# Altium PCB GT1022_V3.PcbDoc (part 2 of 2)
Units mm, origin at the board's own origin, x right, y up, seen from the top; angles counter-clockwise.
Board outline 37.01 x 59.52 mm, 4 copper layers (L1, L2, L3, L4), stack 0.734 mm thick; 114 components, 83 nets, 524 pads, 318 vias.
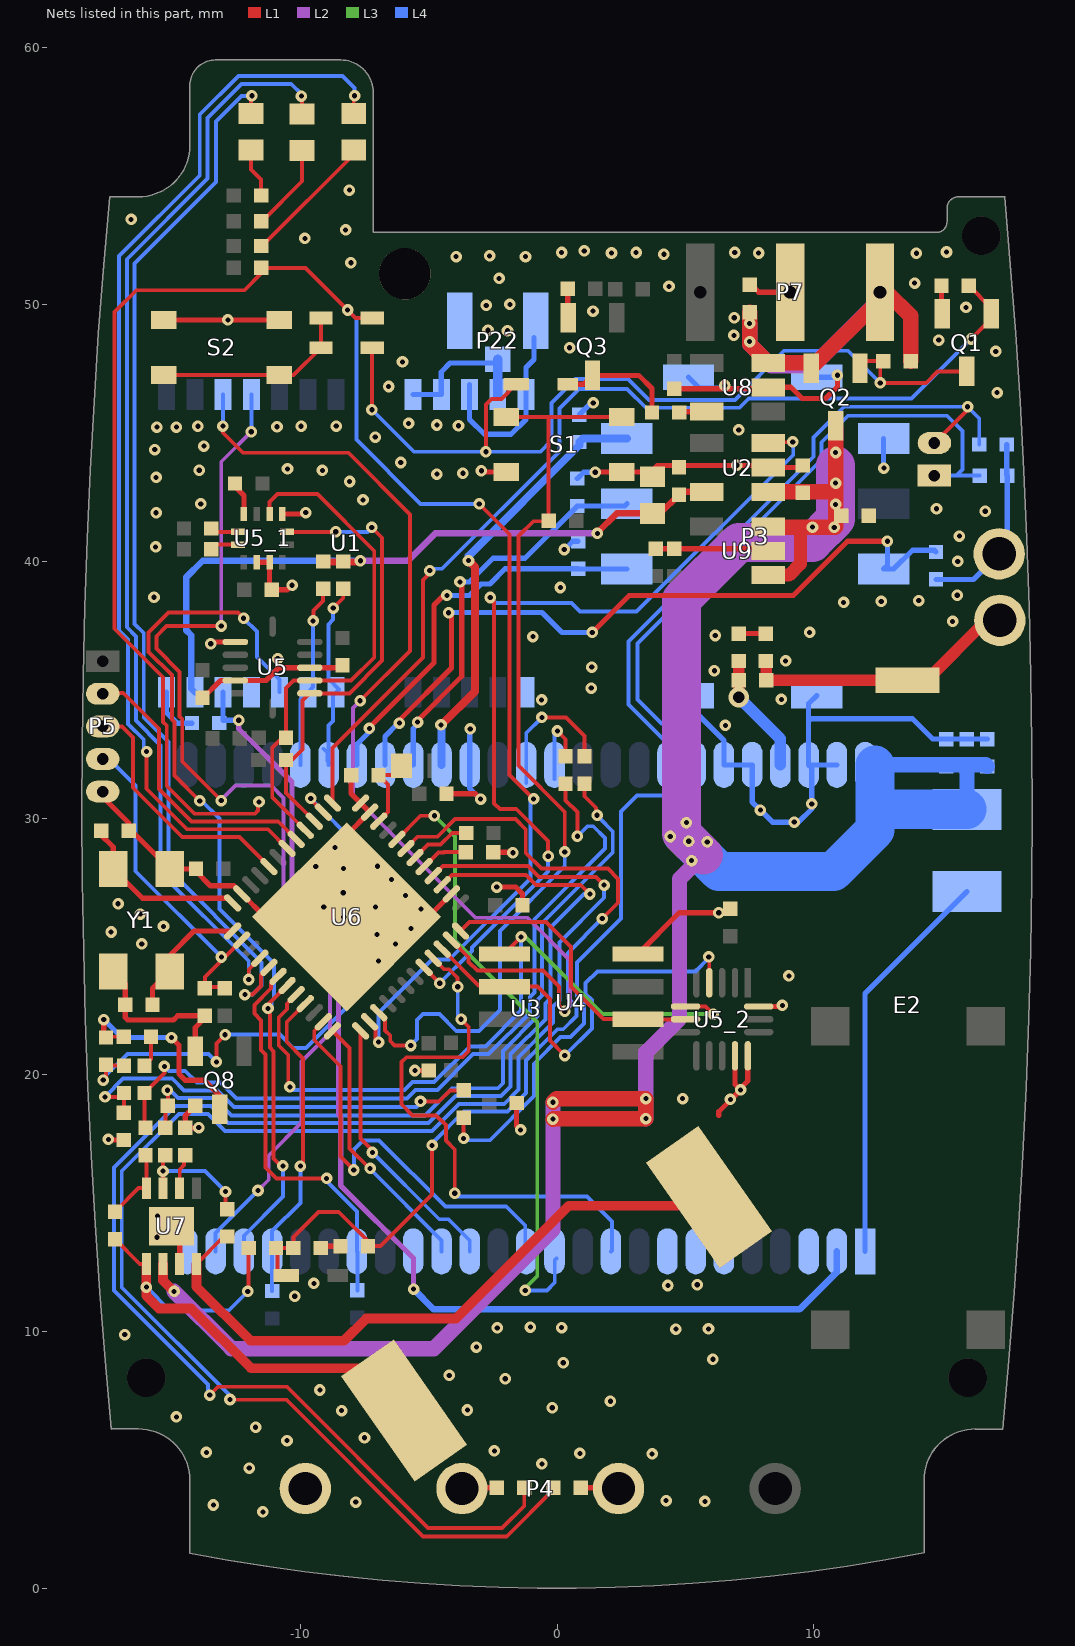
[diagram p4: the nets of this part, all layers, seen from the top]

## Via types
v1: diameter 0.45, hole 0.2, L1 to L4, 317 vias
v2: diameter 0.8, hole 0.45, L1 to L4, 1 vias

## Nets (pads, with @x,y where several pads share a name; then routed paths per layer and width w, separated by ;. In a path a pad name is that pad's centre, name@x,y a point inside that pad or via, vN(x,y) a via of type N, cw(c..) or ccw(c..) an arc to the next point about the centre after c; other vN are vias at no path point) (continued)
GND: C3.1 C5.1 C6.1 C7.1 C8.2 C9.2 C10.1 C11.2 C12.1 C13.1 C14.1 C15.1 C16.2 C17.1 C18.1 C19.1 C20.2 C21.1 C22.1 C23.2 C24.2 C25.2 C26.1 C27.1 C28.1 C29.1 C31.2 C34.2 C35.1 C37.1 C38.1 C39.1 C40.1 C41.2 C42.1 C43.2 C73.1 C74.1 C75.1 J5.1 P3.5 P3.8 P3.9 P3.10 P3.11 P4.4 P5.5 P7.2 P22.2 P22.3 pad.1@-5.93,51.2 Q1.2 Q3.2 Q8.2 R15.2 R24.2 R32.1 R70.1 S1.1 S1.2 S2.1 S2.2 U1.10 U1.12 U1.13 U1.24 U2.2 U3.1 U3.3 U3.6 U3.7 U3.8 U3.17 U3.25 U3.36 U3.45 U3.46 U3.48 U3.49 U4.4 U5.1 U5.4 U5.8 U5_1.1 U5_1.4 U5_1.8 U5_1.9 U5_2.12 U5_2.13 U5_2.16 U6.2 U6.11 U6.12 U6.23 U6.49 U7.7 U7.9 U8.2 U9.2 Y1.2 Y1.4 | length 153.7
  L1 w0.203: P5.5@-17.7,31.03 -17.7,30.82 -16.683,29.803 C29.1@-16.683,29.5 ; v1(-17.48,17.48) -17.457,17.457 R70.1@-16.88,17.457 ; Y1.4@-17.29,24.02 -16.823,23.553 C34.2@-16.823,22.73 -16.823,22.233 -16.72,22.13 -14.94,22.13 -14.773,22.297 C28.1@-13.721,22.297 -13.721,22.213 -14.094,21.84 Q8.2@-14.094,20.91 ; C29.1@-16.84,29.44 -16.51,29.44 Y1.2@-15.09,28.02 C24.2@-14.063,28.02 -14.063,27.927 -13.495,27.358 -12.595,27.358 U6.23@-12.285,27.048 -11.383,26.146 U6.49@-8.201,26.146 -8.201,29.328 U6.11@-7.3,30.23 U6.12@-7.653,30.584 -8.023,30.954 C27.1@-8.023,31.67 ; S2.1@-15.321,49.405 v1(-12.82,49.405) S2.2@-10.821,49.405 ; U7.9@-15.024,14.107 -14.699,13.782 U7.7@-14.699,12.632 ; C31.2@-14.094,18.786 -14.487,18.393 C37.1@-14.487,17.93 -13.97,17.93 v1(-13.96,17.94) ; C22.1@-13.81,34.687 -13.783,34.687 -13.112,35.358 U5.4@-12.533,35.358 -11.332,35.358 -10.832,35.858 ; v1@-13.566,36.694 -13.402,36.858 U5.1@-12.533,36.858 ; C74.1@-12.543,43.03 -12.543,42.903 -12.2,42.56 U5_1.4@-12.2,41.84 ; U5_1.8@-11.7,39.965 U5_1.9@-11.2,39.965 -11.2,38.973 C73.1@-11.117,38.89 -10.5,38.89 v1(-10.32,39.07) ; v1(-10.88,36.21) -10.88,35.907 -10.832,35.858 ; U5_1.1@-10.7,41.84 -9.85,41.84 v1(-9.79,41.9) ; R24.2@-9.207,13.252 -9.137,13.322 C35.1@-8.434,13.322 ; C21.1@-8.36,35.858 U5.8@-9.633,35.858 -10.832,35.858 ; U6.49@-7.83,26.17 -7.71,26.29 -4.876,26.29 U6.2@-4.118,27.048 ; v1(-5.54,20.167) C38.1@-5,20.167 ; C23.2@-4.307,30.95 -3.19,30.95 v1(-2.98,30.74) ; v1(-2.95,43.53) -2.95,43.57 -2.857,43.477 S1.2@-1.975,43.477 S1.2@-2.267,43.477 ; C25.2@-2.487,28.67 -1.74,28.67 v1(-1.72,28.65) ; v1(-2.35,27.31) -1.61,27.31 -1.347,27.047 C26.1@-1.347,26.6 ; C20.2@-1.577,18.9 -1.577,18.007 v1(-1.42,17.85) ; R32.1@0.417,50.62 0.417,49.508 Q3.2@0.43,49.495 ; v1(1.49,43.47) 1.497,43.477 S1.1@2.525,43.477 3.643,43.477 3.9,43.733 8.107,43.733 8.23,43.61 8.273,43.653 C7.1@9.34,43.653 ; U4.4@3.15,24.705 4.755,26.31 v1(6.3,26.31) ; C40.1@3.84,40.493 C41.2@4.57,40.493 8.137,40.493 U9.2@8.22,40.41 8.45,40.41 U9.2@8.54,40.5 ; C42.1@4.57,46.727 8.177,46.727 U8.2@8.23,46.78 9.11,46.78 9.55,46.34 10.46,46.34 10.92,46.8 v1(10.92,47.25) ; 6.3,18.41 6.3,18.56 v1(7.149,19.409) v1@7.114,19.444 ; U5_2.12@6.93,20.735 6.93,19.628 v1@7.114,19.444 ; C12.1@7.08,37.183 C13.1@8.13,37.183 ; U5_2.13@7.43,20.735 7.43,19.76 v1@7.114,19.444 ; C39.1@7.46,50.88 7.86,50.48 P7.2@9.079,50.48 ; U5_2.16@7.855,22.66 8.74,22.66 v1(8.78,22.7) ; R15.2@14.977,50.74 14.977,49.678 Q1.2@15.01,49.645
  L4 w0.203: U1.24@-15.21,34.9 -15.21,34.11 -14.79,33.69 C3.1@-14.223,33.69 ; U1.10@-3.41,46.89 U1.10@-3.41,46.5 -3.41,45.53 -2.83,44.95 -1.79,44.95 -1.21,45.53 U1.12@-1.21,46.5 -1.21,47.55 -0.9,47.86 P22.2@-0.9,48.72 ; v1(-3.38,33.47) -3.4,33.45 U3.36@-3.4,32.07 -3.4,31.16 v1(-2.98,30.74) ; v1(0.28,40.46) 0.29,40.46 0.613,40.783 C19.1@0.82,40.783 ; C18.1@0.79,43.223 1.037,43.47 v1(1.49,43.47) ; C16.2@0.87,45.713 1.327,46.17 v1(1.41,46.17) ; P3.9@5.12,34.77 5.12,34.4 6.5,33.02 U3.45@6.5,32.07 U3.46@7.6,32.07 7.6,30.63 v1(7.92,30.31) 8.39,29.84 v1(9.24,29.84) 9.41,29.84 9.92,30.35 v1(9.92,30.55) 9.92,31.95 U3.48@9.8,32.07 ; P3.10@5.12,47.17 5.55,46.74 v1@6.54,46.74 ; P3.8@10.12,34.77 9.8,34.45 9.8,33.78 ; P3.11@10.12,47.17 10.84,47.17 v1(10.92,47.25) ; U3.49@10.9,32.07 U3.48@9.8,32.07 ; U3.1@12,13.12 12,23.17 C11.2@15.97,27.14 ; P3.5@12.72,44.78 12.72,43.64 v1(12.73,43.63) ; C17.1@14.76,39.297 16.227,39.297 J5.1@17.22,40.29 17.533,40.603 C14.1@17.533,43.34 17.513,43.36 C15.1@17.513,44.55 ; C10.1@16.76,33.073 C8.2@15.96,33.073 C9.2@15.16,33.073 14.637,33.073 13.84,33.87 9.89,33.87 9.8,33.78 ; U3.48@9.8,32.07 9.8,33.78
  other v1: -11.46,2.97 -13.39,3.24 -7.84,3.35 5.76,3.38 4.25,3.41 -11.99,4.68 -0.59,4.84 3.7,5.23 0.89,5.25 -13.66,5.29 -2.44,5.35 -10.52,5.75 -7.5,5.86 -11.74,6.27 -14.83,6.67 -8.39,6.92 -3.49,6.94 -0.19,7.03 2.08,7.28 -9.24,7.72 -2.02,8.16 -4.2,8.29 0.24,8.78 6.07,8.92 -3.14,9.39 -16.84,9.88 4.63,10.09 5.9,10.1 -2.33,10.14 0.18,10.15 -1.04,10.17 -10.22,11.37 4.32,11.79 5.46,11.82 -9.47,11.87 -15.59,13.67 -15.56,14.495 6.75,19.04 4.89,19.07 9.03,23.85 -6.96,24.43 -6.3,25.09 -16.18,25.1 -7.02,25.46 -17.37,25.56 -5.69,25.69 -15.33,25.78 -8.31,26.146 -16.23,26.26 -5.3,26.46 -9.09,26.54 -7.07,26.53 -17.1,26.66 -5.9,26.98 -8.33,27.09 -6.45,27.6 -8.32,28.03 -9.4,28.11 -7,28.12 -8.65,28.85 6.56,33.61 -0.6,34.6 8.74,34.62 1.33,35.06 6.13,35.74 1.35,35.88 8.9,36.12 -13.49,36.79 -0.94,37.07 6.16,37.11 9.84,37.23 15.41,37.66 11.16,38.4 12.63,38.44 14.09,38.47 -15.7,38.6 15.59,38.68 0.13,38.98 15.61,40 -15.64,40.56 15.67,40.98 -15.62,41.89 16.68,41.95 14.78,42.05 -13.88,42.24 -7.56,42.39 -8.08,43.11 -15.62,43.27 -4.68,43.4 -3.67,43.43 -13.94,43.55 -9.14,43.54 -10.5,43.6 7,43.74 -6.09,43.85 -15.67,44.35 -13.76,44.49 -7.08,44.84 7.08,45.12 -15.59,45.23 -14.83,45.23 -13.99,45.26 -10.91,45.24 -9.97,45.26 -8.6,45.27 -3.84,45.28 -4.68,45.31 -5.78,45.37 17.14,46.57 -6.56,46.81 6.54,46.85 -6.02,47.77 17.09,48.18 0.49,48.32 14.87,48.62 -1.93,48.98 -2.69,49 1.4,49.75 15.93,49.89 -2.76,49.97 -1.84,50.01 4.36,50.71 13.93,50.84 -2.26,51.02 -8.03,51.63 -3.93,51.87 -1.23,51.87 -2.63,51.9 4.16,51.96 2.12,52.01 7.85,52.01 14,52 0.18,52.03 3.08,52.03 6.92,52.03 15.17,52.05 1.06,52.09 -9.82,52.58 -8.24,52.91 -16.59,53.32 -8.09,54.46
GPS_EN: U2.3 U6.44 | length 35
  L1 w0.152: U6.44@-5.178,24.184 v1@-4.65,23.656 ; v1(-2.6,38.59) -2.45,38.44 -2.45,30.57 -2.23,30.35 -1.59,30.35 -0.345,29.105 v1(-0.345,28.51) ; U2.3@8.23,44.603 8.267,44.64 v1@9.21,44.64
  L4 w0.152: v1@-4.65,23.486 -3.307,24.828 -3.307,24.956 -0.345,27.918 v1(-0.345,28.51) ; v1(-2.6,38.59) -2.38,38.37 0.57,38.37 0.9,38.04 3.1,38.04 9.2,44.14 9.2,44.63 v1(9.18,44.65) 9.2,44.65 v1@9.21,44.64
  other v1: -4.572,23.563
GPS_EXTINT0: U1.4 U3.24 | length 42.8
  L1 w0.152: v1(-13.08,30.68) -14.6,32.2 -14.6,33.859 -14.702,33.961 -14.702,35.692 -15.61,36.6 -15.61,37.08 -15.21,37.48 v1(-13.08,37.48)
  L2 w0.152: v1@-13.095,30.695 -12.52,31.27 -11.133,31.27 -10.65,30.787 -10.65,26.49 -8.84,24.68 -8.84,21.63 -9.948,20.522 -9.948,18.132 -11.23,16.85 -11.23,15.91 v1(-11.649,15.491) ; v1(-13.08,37.48) -13.08,43.88 v1(-11.91,45.05)
  L4 w0.152: U3.24@-13.3,13.12 -13.3,13.84 v1(-11.649,15.491) ; v1(-11.91,45.05) U1.4@-11.91,46.5
GPS_PULSE: U1.3 U6.47 | length 41.8
  L1 w0.152: v1(-13.02,45.27) -13.02,45.01 -12.24,44.23 -8.13,44.23 -5.73,41.83 -5.73,36.51 v1(-7.67,34.57) ; U6.47@-4.118,25.245 -3.45,24.577 -3.45,24.4 -3.103,24.053 -0.548,24.053 0.07,23.435 ; 0.07,22.87 0.07,23.435 ; v1(0.3,22.47) 0.07,22.7 0.07,23.435
  L2 w0.152: v1(-7.67,34.57) -7.946,34.294 -7.946,30.886 -3.175,26.115 -1.156,26.115 0.5,24.458 0.5,22.67 v1(0.3,22.47)
  L4 w0.152: v1(-13.02,45.27) -13.01,45.28 U1.3@-13.01,46.5
GPS_SCL: R1.1 U1.19 U3.30 | length 7.1
  L1 w0.152: v1@-9.49,37.78 -9.49,38.08 -9.11,38.46 R1.1@-9.11,38.927
  L4 w0.152: U3.30@-10,32.07 -10,34.61 U1.19@-9.71,34.9 -9.5,35.11 v1(-9.5,37.68)
GPS_SDA: R2.1 U1.18 U3.31 | length 8.8
  L1 w0.152: v1(-8.72,38.18) -8.33,38.57 R2.1@-8.33,38.927
  L4 w0.152: U3.31@-9.1,32.7 -8.95,32.55 -8.95,32.22 U3.31@-8.9,32.17 ; U3.31@-8.9,32.07 U3.31@-8.9,32.17 ; U3.31@-8.9,32.9 U3.31@-8.9,32.17 ; U3.31@-8.86,32.13 U3.31@-8.9,32.17 ; v1(-8.72,38.18) -8.72,37.73 -8.91,37.54 -8.91,35.429 -8.496,35.014 U1.18@-8.61,34.9 -8.72,34.79 -8.72,33.78 -8.9,33.6 U3.31@-8.9,32.17
GPS_TXD: U1.20 U3.23 U6.31 | length 35.7
  L1 w0.152: v1(-13.92,30.67) -14.902,31.652 -14.902,33.734 -15.005,33.836 -15.005,35.567 -15.912,36.475 -15.912,37.228 -15.14,38 -12.43,38 v1(-12.21,37.78) ; v1@-11.339,22.504 -11.19,22.355 -11.19,21.054 -11.048,20.912 -11.048,16.739 v1@-10.758,16.45 ; v1@-11.26,22.734 U6.31@-10.517,23.477
  L4 w0.152: v1(-13.92,30.67) -13.84,30.67 -13.15,29.98 -13.15,26.45 -11.03,24.33 -11.03,22.964 -11.13,22.864 -11.13,22.713 v1(-11.26,22.583) ; v1(-12.21,37.78) -11.69,37.26 -11.69,36.27 -10.81,35.39 U1.20@-10.81,34.9 ; U3.23@-12.2,13.12 -12.2,13.73 -10.68,15.25 v1(-10.68,16.45)
GSM_DTR: U3.12 U6.8 | length 24.4
  L1 w0.152: U6.8@-6.239,29.169 -5.318,30.09 v1(-4.78,30.09)
  L3 w0.152: v1(-4.78,30.09) -3.973,29.283 -3.973,25.233 -0.77,22.03 -0.77,12.17 -1.24,11.7 v1(-1.24,11.6)
  L4 w0.152: v1(-1.24,11.6) -0.39,11.6 -0.09,11.9 -0.09,12.78 -0.03,12.84 U3.12@-0.02,12.84
GSM_POWER: R3.2 U3.19 U6.30 | length 15.4
  L1 w0.152: U6.30@-10.871,23.831 -11.14,23.561 -11.14,23.37 -11.79,22.72 -11.79,22.38 -11.53,22.12 -11.53,20.966 -11.35,20.786 -11.35,16.38 -10.93,15.96 v1(-8.98,15.96)
  L4 w0.152: v1(-8.98,15.96) -8.98,15.86 -7.8,14.68 U3.19@-7.8,13.12 -7.78,13.1 R3.2@-7.78,11.603
GSM_RI: U3.10 U6.45 | length 21.4
  L1 w0.152: U6.45@-4.825,24.538 -4.397,24.11 -4.21,24.11 -3.88,23.78 -3.88,23.43 v1(-3.87,23.43) ; v1(-3.985,15.385) -3.985,17.095 -4.33,17.44 -4.33,18.04 -4.71,18.42 -5.63,18.42 -6.06,18.85 -6.06,20.49 -5.868,20.682 -3.689,20.682 -3.44,20.932 -3.44,21.86 v1(-3.74,22.16)
  L4 w0.152: v1(-3.985,15.385) -3.86,15.26 1.17,15.26 2.14,14.29 2.14,13.16 U3.10@2.1,13.12 ; v1(-3.87,23.43) -3.87,22.29 v1(-3.74,22.16)
GSM_RST: R4.2 U3.22 U6.33 | length 12.2
  L1 w0.152: v1@-9.9,16.44 -9.9,20.64 -10.53,21.27 -10.53,22.05 U6.33@-9.81,22.77
  L4 w0.152: R4.2@-11.1,11.573 U3.22@-11.1,13.12 -11.1,13.91 -10,15.01 v1(-10,16.44)
GSM_RTS: U3.13 U6.35 | length 16.6
  L1 w0.152: U6.35@-9.103,22.063 -9.46,21.706 -9.46,21.36 -8.43,20.33 -8.43,16.81 v1@-7.91,16.29
  L4 w0.152: v1@-7.91,16.29 -7.91,17.09 -7.56,17.44 -6.93,17.44 -4.35,14.86 -1.98,14.86 -1.24,14.12 -1.24,13.16 U3.13@-1.2,13.12
  other v1: -7.92,16.29
LED_BLUE: D1.2 U6.18 | length 42.4
  L1 w0.152: v1(-15.99,32.59) -15.99,31.14 -14.414,29.564 -11.265,29.564 U6.18@-10.517,28.816 ; D1.2@-7.921,57.444 -7.921,58.102 v1(-7.889,58.134)
  L4 w0.152: v1(-15.99,32.59) -16.1,32.7 -16.1,33.06 -16.71,33.67 -16.71,36.951 -17.064,37.304 -17.064,51.892 -13.919,55.036 -13.919,57.398 -12.415,58.903 -8.357,58.903 -8.111,58.656 ; -8.032,58.577 -8.111,58.656 ; v1(-7.889,58.134) -7.889,58.434 -8.111,58.656
LED_GREEN: D3.2 U6.29 | length 42
  L1 w0.152: v1(-12.16,23.12) -11.87,23.12 -11.53,23.46 -11.53,23.878 U6.29@-11.224,24.184 ; D3.2@-11.921,57.444 -11.921,58.1 v1(-11.887,58.134)
  L4 w0.152: v1(-12.16,23.12) -11.87,23.12 -11.51,23.48 -11.51,24.38 -15.138,28.008 -15.138,32.96 -16.1,33.923 -16.1,37.203 -16.454,37.557 -16.454,51.607 -13.287,54.774 -13.287,57.136 -12.289,58.134 -11.993,58.134 v1@-11.857,58.27
LED_RED: D2.2 U6.28 | length 43
  L1 w0.152: v1(-12.01,23.71) -12.01,24.106 U6.28@-11.578,24.538 ; v1(-9.959,58.12) -9.936,58.097 D2.2@-9.936,57.43
  L4 w0.152: v1(-12.01,23.71) -12.01,24.424 ; -12.009,24.425 -15.44,27.856 -15.44,32.831 -16.405,33.796 -16.405,37.077 -16.759,37.43 -16.759,51.765 -13.614,54.91 -13.614,57.272 -12.289,58.598 -10.356,58.598 -9.959,58.202 v1(-9.959,58.12)
MCU_AU_OUT: R71.2 R72.1 U6.14 | length 23.1
  L1 w0.152: v1(-17.68,19.79) -17.57,19.9 R72.1@-17.57,20.387 -17.537,20.353 R71.2@-16.87,20.353 R71.2@-16.867,20.357 ; v1(-13.269,20.499) -13.269,21.221 v1(-12.93,21.56) ; v1(-9.596,30.767) -9.586,30.757 -9.586,30.713 U6.14@-9.103,30.23
  L4 w0.152: v1(-17.68,19.79) -17.68,19.87 -16.74,20.81 -13.58,20.81 v1(-13.269,20.499) ; v1(-12.93,21.56) -10.8,21.56 -10.275,21.035 -9.775,21.035 -7.67,23.14 -7.67,28.841 v1(-9.596,30.767)
MIC_BIAS: C14.2 C70.2 P2.1 U3.44 | length 47.5
  L1 w0.152: v1(-3.64,17.52) C70.2@-3.64,18.327
  L4 w0.152: v1@-3.51,17.45 -2.619,17.45 -0.9,19.169 -0.9,20.43 0.14,21.47 0.53,21.47 1.054,21.994 1.054,22.782 0.78,23.056 0.78,24.38 2.49,26.09 2.49,30.26 3.11,30.88 4.8,30.88 5.4,31.48 U3.44@5.4,32.07 5.4,32.64 4.35,33.69 4.07,33.69 3.14,34.62 3.14,36.797 10.3,43.957 10.3,44.64 11.33,45.67 15.19,45.67 15.79,45.07 15.79,43.58 15.55,43.34 ; P2.1@14.7,43.34 15.55,43.34 ; C14.2@16.467,43.34 15.55,43.34
MIC_GND: C15.2 P2.2 U3.43 | length 26.5
  L1 w0.152: P2.2@14.7,44.61 15.99,45.9 v1(15.99,46.02)
  L4 w0.152: U3.43@4.3,32.07 4.3,32.91 2.79,34.42 2.79,36.875 9.99,44.075 9.99,44.825 11.185,46.02 v1(15.99,46.02) 16.447,45.563 C15.2@16.447,44.55
NetC12_2: C12.2 L2.2 U3.47 | length 4.7
  L1 w0.45: L2.2@7.06,35.387 L2.2@7.077,35.37 ; v2(7.08,34.71) 7.08,35.367 L2.2@7.077,35.37 ; C12.2@7.08,36.117 7.077,36.113 L2.2@7.077,35.37
  L4 w0.45: v2(7.08,34.71) 8.7,33.09 U3.47@8.7,32.07
NetC13_2: C13.2 E2.1 J4.1 L2.1 | length 10.8
  L1 w0.45: C13.2@8.13,36.117 8.143,36.103 L2.1@8.143,35.37 E2.1@13.65,35.37 14.4,35.37 16.73,37.7 J4.1@17.25,37.7
NetC25_1: C25.1 U6.5 | length 2
  L1 w0.152: U6.5@-5.178,28.109 -5.175,28.109 -4.618,28.665 -4.409,28.665 -4.405,28.67 -3.681,28.67 -3.553,28.542 C25.1@-3.447,28.542
NetC27_2: C27.2 L3.1 U6.10 | length 3.1
  L1 w0.152: U6.10@-6.946,29.876 -6.591,30.231 -6.591,31.305 C27.2@-6.957,31.67 -6.432,31.67 L3.1@-6.062,32.04
NetC31_1: C31.1 R21.2 R26.1 | length 29.2
  L1 w0.152: R21.2@-15.257,17.93 -15.257,18.69 C31.1@-15.161,18.786 v1@-15.161,19.382 ; R26.1@1.07,31.337 1.07,30.85 1.52,30.4 v1@1.52,30.23
  L4 w0.152: v1(-15.176,19.398) -15.124,19.45 -14.762,19.088 -13.353,19.088 -12.685,18.42 -5.15,18.42 -4.097,19.473 -2.307,19.473 -2.11,19.67 -2.11,20.931 -0.756,22.285 -0.756,22.907 -0.58,23.083 -0.58,25.9 2.17,28.65 2.17,29.48 1.67,29.98 v1@1.67,30.11
  other v1: 1.56,30.11
NetC36_1: C36.1 R23.2 R25.1 | length 30.6
  L1 w0.152: R23.2@-16.034,17.932 -16.07,17.968 C36.1@-16.07,19.29 -15.295,20.065 v1@-15.295,20.326 ; R25.1@0.33,31.337 0.33,30.69 0.79,30.23 v1(0.79,29.29)
  L4 w0.152: v1@-15.295,20.326 -15.12,20.152 -14.484,20.152 -14.025,19.692 -13.102,19.692 -12.48,19.07 -5.848,19.07 -5.507,19.411 -4.661,19.411 -3.271,20.802 -2.667,20.802 -1.058,22.41 -1.058,23.033 -0.882,23.209 -0.882,26.058 1.868,28.808 1.868,29.222 1.41,29.68 1.18,29.68 v1(0.79,29.29)
  other v1: -15.293,20.328
NetC36_2: C36.2 R27.2 | length 1.2
  L1 w0.152: C36.2@-16.07,20.357 -15.817,20.61 R27.2@-15.817,21.48
NetC37_2: C37.2 U7.2 | length 1.4
  L1 w0.152: U7.2@-14.699,15.582 -14.699,16.309 -14.529,16.48 -14.529,16.821 C37.2@-14.487,16.863
NetC70_1: C70.1 R70.2 R71.1 | length 16.4
  L1 w0.152: v1(-17.61,19.14) -17.017,19.14 R71.1@-16.87,19.287 -16.87,18.533 R70.2@-16.88,18.523 ; v1(-5.32,18.96) -4.61,18.96 -4.177,19.393 C70.1@-3.64,19.393
  L4 w0.152: v1(-17.61,19.14) -16.901,19.849 -14.99,19.849 -14.53,19.39 -13.228,19.39 -12.578,18.74 -5.48,18.74 v1@-5.414,18.806
NetD1_1: D1.1 R5.1 | length 5.2
  L1 w0.152: R5.1@-11.488,52.283 -7.921,55.85 D1.1@-7.921,56.022
NetD2_1: D2.1 R6.1 | length 3.4
  L1 w0.152: R6.1@-11.498,53.243 -9.936,54.804 D2.1@-9.936,56.008
NetD3_1: D3.1 R7.1 | length 1.9
  L1 w0.152: D3.1@-11.921,56.022 -11.921,55.264 -11.528,54.87 R7.1@-11.528,54.253
NetD4_1: D4.1 D5.1 S2.3 S2.4 | length 7.7
  L1 w0.152: S2.3@-15.321,47.255 S2.4@-10.821,47.255 -10.265,47.255 D5.1@-9.2,48.32 D4.1@-9.2,49.48
NetD5_2: D5.2 D10.2 Q1.3 Q2.1 R29.1 | length 35.4
  L1 w0.152: v1(-7.215,45.905) D5.2@-7.215,48.305 ; v1(-2.77,44.27) -2.77,46.11 -2.552,46.328 -2.162,46.328 D10.2@-1.59,46.9 ; Q2.1@11.8,47.525 12.075,47.8 R29.1@12.707,47.8 12.59,47.683 v1(12.59,46.95) 14.38,46.95 14.825,47.395 Q1.3@15.96,47.395
  L4 w0.152: v1(-7.215,45.905) -5.58,44.27 v1(-2.77,44.27) -0.65,44.27 -0.215,44.705 -0.215,46.165 0.72,47.1 2.77,47.1 3.584,46.286 6.928,46.286 8.845,48.203 11.337,48.203 v1(12.59,46.95)
NetD10_1: D10.1 Q3.3 R30.2 | length 4.6
  L1 w0.2: Q3.3@1.38,47.245 3.179,47.245 3.697,46.727 R30.2@3.697,45.8
  L1 w0.203: D10.1@0.41,46.9 1.035,46.9 Q3.3@1.38,47.245
NetP4_2: P4.2 R13.1 | length 1.5
  L1 w0.203: R13.1@0.923,3.91 2.366,3.91 P4.2@2.395,3.882
NetP4_3: P4.3 R14.1 | length 1.4
  L1 w0.203: P4.3@-3.705,3.882 -3.677,3.91 R14.1@-2.343,3.91
NetP6_1: P6.1 R18.1 R20.2 U7.5 | length 19.8
  L1 w0.152: R18.1@-17.22,13.597 -16.256,12.632 U7.5@-15.999,12.632 ; v1@-12.05,11.55 v1(-12.05,11.56) -12.013,11.597 R20.2@-12.013,13.25
  L1 w0.381: U7.5@-15.999,12.632 v1(-15.999,11.727) -15.999,11.389 -15.502,10.892 -14.252,10.892 -11.93,8.57 -7.76,8.57 P6.1@-6.93,7.74
  L4 w0.152: v1(-15.999,11.727) -15.092,10.82 -12.79,10.82 v1(-12.05,11.56)
NetP6_2: P6.2 R19.1 U7.8 | length 25.5
  L1 w0.152: U7.8@-14.049,12.632 -12.985,13.697 R19.1@-12.85,13.697 R19.1@-12.707,13.554
  L1 w0.381: U7.8@-14.049,12.632 -14.049,11.739 -11.95,9.64 -8.29,9.64 -7.43,10.5 -3.94,10.5 0.46,14.9 P6.2@5.7,14.9
NetP22_1: P22.1 U1.8 U1.9 U1.11 | length 5.8
  L4 w0.203: U1.8@-5.61,46.5 U1.9@-4.51,46.5 -4.51,47.38 -4.17,47.72 -2.46,47.72 P22.1@-2.31,47.87
  L4 w0.381: U1.11@-2.31,46.45 U1.11@-2.31,46.5 P22.1@-2.31,47.87
NetQ8_3: Q8.3 R27.1 R72.2 | length 8.4
  L1 w0.152: R72.2@-17.57,21.453 -17.543,21.48 R27.1@-16.883,21.48
  L1 w0.203: v1(-17.66,22.15) -17.66,21.543 R72.2@-17.57,21.453 ; v1(-15.02,21.45) -15.03,21.45 -14.732,21.152 -14.732,20.032 -14.49,19.79 -13.748,19.79 -13.144,19.186 Q8.3@-13.144,18.66
  L4 w0.203: v1(-17.66,22.15) -16.96,21.45 v1(-15.02,21.45)
NetR13_2: R13.2 U6.4 | length 60
  L1 w0.152: v1@-12.74,7.34 -10.54,7.34 -5.22,2.02 -1.96,2.02 -0.143,3.837 R13.2@-0.143,3.91 ; U6.4@-4.825,27.755 -4.447,28.133 -1.135,28.133 -0.702,27.7 1.52,27.7 v1(1.835,27.385)
  L4 w0.152: v1@-12.665,7.425 -16.958,11.718 -16.958,16.255 -14.735,18.478 -13.598,18.478 -12.936,17.815 -4.875,17.815 -3.822,18.868 -2.057,18.868 -1.505,19.42 -1.505,20.681 -0.151,22.034 -0.151,22.657 0.09,22.898 0.09,25.15 1.835,26.895 v1(1.835,27.385)
  other v1: -12.74,7.35
NetR14_2: R14.2 U6.3 | length 58.4
  L1 w0.152: v1(-13.53,7.52) -13.202,7.848 -10.528,7.848 -5.02,2.34 -2.14,2.34 -1.277,3.203 R14.2@-1.277,3.91 ; U6.3@-4.471,27.402 -4.093,27.78 -1.21,27.78 -0.828,27.398 0.922,27.398 v1(1.28,27.04)
  L4 w0.152: v1@-13.6,7.62 -13.6,7.932 -17.26,11.592 -17.26,16.38 -14.86,18.78 -13.473,18.78 -12.811,18.118 -5.01,18.118 -3.957,19.17 -2.182,19.17 -1.807,19.545 -1.807,20.806 -0.454,22.159 -0.454,22.782 -0.252,22.984 -0.252,25.738 1.05,27.04 v1(1.28,27.04)
NetR16_1: R16.1 U6.6 | length 2.4
  L1 w0.152: U6.6@-5.532,28.462 -5.027,28.968 -4.535,28.968 -4.082,29.42 R16.1@-3.543,29.42
NetR18_2: R18.2 R23.1 U7.4 | length 2.9
  L1 w0.152: R18.2@-17.22,14.663 -16.301,15.582 U7.4@-15.999,15.582 -15.999,16.83 R23.1@-16.034,16.865
NetR19_2: R19.2 R21.1 U7.3 | length 4.8
  L1 w0.152: U7.3@-15.349,15.582 v1(-15.349,16.246) -15.349,16.771 R21.1@-15.257,16.863 ; v1(-12.916,15.446) -12.916,14.829 R19.2@-12.85,14.763
  L4 w0.152: v1(-15.349,16.246) -13.716,16.246 v1(-12.916,15.446)
NetR30_1: R30.1 U8.5 | length 1.1
  L1 w0.203: R30.1@4.763,45.8 4.793,45.83 U8.5@5.83,45.83
NetR73_1: R73.1 U5_1.6 | length 1.1
  L1 w0.152: R73.1@-13.467,40.47 -13.287,40.65 U5_1.6@-12.425,40.65
NetR74_1: R74.1 U5_1.5 | length 1.1
  L1 w0.152: R74.1@-13.467,41.28 -13.337,41.15 U5_1.5@-12.425,41.15
OSC1: C29.2 U6.24 Y1.3 | length 6.8
  L1 w0.203: C29.2@-17.82,29.4 -17.29,28.87 Y1.3@-17.29,28.02 -16.148,26.878 -12.822,26.878 U6.24@-12.638,26.694
OSC2: C34.1 U6.25 Y1.1 | length 5
  L1 w0.203: C34.1@-15.757,22.73 -15.757,23.353 Y1.1@-15.09,24.02 -15.09,24.65 -14.142,25.598 U6.25@-12.638,25.598
PWR_EN: Q1.1 R15.1 U6.13 | length 39.9
  L1 w0.152: U6.13@-8.749,30.584 -8.749,32.727 -5.23,36.246 -5.23,39.28 v1@-4.915,39.595 ; R15.1@16.043,50.74 16.91,49.873 Q1.1@16.91,49.645 16.91,49.44 v1(16.13,48.66)
  L4 w0.152: v1@-5.02,39.52 -4.83,39.71 -4.48,39.71 0.09,44.28 0.09,45.96 0.85,46.72 2.719,46.72 3.457,45.982 7.108,45.982 7.467,46.34 13.81,46.34 15.369,47.899 v1(16.13,48.66)
  other v1: -4.96,39.64
PWR_KEY: D4.2 R12.2 U6.38 | length 72.1
  L1 w0.152: v1@-11.65,30.58 -11.65,30.29 -11.771,30.169 -14.119,30.169 -15.205,31.255 -15.205,33.602 -15.35,33.748 -15.35,35.485 -17.24,37.375 -17.24,49.709 -16.389,50.56 -12.18,50.56 -11.528,51.212 R12.2@-11.528,51.43 -9.8,51.43 v1(-8.161,49.791) -7.85,49.48 D4.2@-7.2,49.48 ; U6.38@-7.3,22.063 -7.07,21.833 -7.07,21.39 v1(-6.95,21.27) v1@-6.95,21.15 ; v1(-3.03,42.24) -1.845,41.055 -1.845,31.675 v1(-0.915,30.745)
  L4 w0.152: v1(-8.161,49.791) -7.82,49.45 -7.82,44.74 -5.32,42.24 v1(-3.03,42.24) ; v1(-6.95,21.27) -6.95,22.413 -4.873,24.49 -4.201,24.49 -1.04,27.651 -1.04,30.621 v1(-0.915,30.745)
  other v1: -11.61,30.63
RESET: C28.2 P5.4 R17.1 U6.26 | length 12.9
  L1 w0.152: v1(-13.078,24.587) v1@-12.943,24.587 ; R17.1@-12.951,23.364 -13.009,23.421 -13.518,23.421 -13.576,23.364 C28.2@-13.721,23.364 -13.721,23.808 v1@-12.943,24.587 ; U6.26@-12.285,25.245 v1@-12.943,24.587
  L4 w0.152: P5.4@-17.44,32.28 -16.42,31.26 -16.42,27.929 v1(-13.078,24.587)
SCL: R10.1 U5.6 U5_1.12 U6.15 | length 18
  L1 w0.152: U5_1.12@-10.52,41.15 v1(-8.62,41.15) ; U6.15@-9.456,29.876 -10.559,30.979 R10.1@-10.559,32.258 -10.33,32.258 -9.919,32.669 -9.919,34.572 U5.6@-9.633,34.858 -8.092,34.858 -6.818,36.133 -6.818,40.918 v1(-7.22,41.32)
  L4 w0.152: v1(-8.62,41.15) -7.39,41.15 v1(-7.22,41.32)
SD_MISO: U4.2 U5_2.7 U6.48 | length 10.6
  L1 w0.152: U6.48@-3.764,25.598 -3.412,25.95 -0.43,25.95 0.55,24.97 0.55,23.43 1.815,22.165 U4.2@3.15,22.165 ; U4.2@3.89,22.16 U5_2.7@5.005,22.16
SD_MOSI: U4.5 U5_2.6 U6.32 | length 28.6
  L1 w0.152: v1@-10.47,19.53 -10.47,20.762 -10.84,21.132 -10.84,22.23 -10.52,22.55 -10.52,22.767 U6.32@-10.164,23.124 ; U4.5@-1.425,24.705 U4.5@-2.05,24.705 -2.05,24.72 v1(-1.4,25.37) ; U5_2.6@5.005,22.66 5.78,22.66 6.09,22.35 v1(6.09,22.36)
  L3 w0.152: v1@-1.22,25.34 -1.21,25.35 1.78,22.36 v1(6.09,22.36)
  L4 w0.152: v1(-10.41,19.53) -10.28,19.4 -5.946,19.4 -5.632,19.714 -4.786,19.714 -3.396,21.104 -2.792,21.104 -1.4,22.496 v1(-1.4,25.37)
SD_SCK: U4.6 U5_2.4 U6.46 | length 16.8
  L1 w0.152: U6.46@-4.471,24.891 -3.06,23.48 U4.6@-2.33,23.48 ; U4.6@-2.05,23.435 -0.765,23.435 -0.28,22.95 -0.28,21.33 v1(0.3,20.75) ; v1(5.91,24.59) 5.93,24.57 U5_2.4@5.93,23.585
  L4 w0.152: v1(0.3,20.75) 1.356,21.806 1.356,22.907 1.11,23.153 1.11,23.57 1.57,24.03 5.39,24.03 5.91,24.55 v1(5.91,24.59)
SDA: R9.1 U5.7 U5_1.2 U6.16 | length 20.1
  L1 w0.152: U5_1.2@-11.2,41.84 -11.2,42.31 -10.89,42.62 -9.33,42.62 -7.12,40.41 -7.12,36.258 -8.02,35.358 U5.7@-9.633,35.358 -10.265,35.358 -10.559,35.064 R9.1@-10.559,33.128 -10.71,33.128 -11.093,32.745 -11.093,30.806 U6.16@-9.81,29.523
SIM_CLK: C19.2 P3.3 U3.32 | length 15.5
  L1 w0.203: v1@-7.32,33.52 -4.79,36.05 -4.79,38.3 -4.42,38.67 v1(-4.29,38.67)
  L4 w0.203: U3.32@-7.8,32.07 -7.8,32.87 v1@-7.26,33.41 ; v1(-4.29,38.67) -3.41,38.67 -2.96,39.12 -2.61,39.12 -2.022,39.708 0.812,39.708 0.82,39.7 P3.3@2.72,39.7
  other v1: -7.31,33.49
SIM_DATA: C17.2 P3.7 U3.33 | length 29.4
  L1 w0.203: v1@-6.15,33.7 -6.13,33.72 -6.13,33.83 -4.11,35.85 -4.11,37.88 v1(-4.225,37.995) ; v1(1.372,37.232) 2.81,38.67 9.2,38.67 11.31,40.78 v1(12.87,40.78)
  L4 w0.203: U3.33@-6.7,32.07 -6.7,33.18 v1@-6.21,33.67 ; v1@-4.225,38.01 -0.59,38.01 0.188,37.232 v1(1.372,37.232) ; v1(12.87,40.78) 12.87,39.85 P3.7@12.72,39.7 13.111,39.7 13.84,40.429 14.694,40.429 C17.2@14.76,40.363
  other v1: -6.14,33.7
SIM_RST: C18.2 P3.2 U3.34 | length 15.7
  L1 w0.203: v1@-5.41,33.76 -5.44,33.79 -3.71,35.52 -3.71,39.07 v1@-3.84,39.2
  L4 w0.203: U3.34@-5.6,32.07 -5.6,33.49 v1@-5.42,33.67 ; v1(-3.78,39.2) -3.42,39.2 -2.5,40.12 -1.247,40.12 C18.2@0.79,42.157 2.637,42.157 P3.2@2.72,42.24
  other v1: -5.43,33.74
SIM_VDD: C16.1 P3.1 U3.35 | length 16.9
  L1 w0.305: v1@-4.5,33.63 -3.2,34.93 -3.2,39.78 v1(-3.45,40.03)
  L4 w0.305: v1(-4.52,33.63) -4.5,33.61 U3.35@-4.5,32.07 ; v1(-3.45,40.03) -3.45,40.201 0.87,44.521 C16.1@0.87,44.647 1.003,44.78 P3.1@2.72,44.78
SOS_KEY: R8.2 S1.3 S1.4 U6.39 | length 37.6
  L1 w0.152: U6.39@-6.946,22.416 -6.7,22.17 -6.7,21.73 -6.499,21.529 -6.499,21.309 -6.33,21.14 v1(-5.7,21.14) ; S1.4@-1.975,45.627 -0.34,45.627 ; R8.2@-0.33,41.56 R8.2@-0.34,41.56 ; R8.2@-0.323,41.577 R8.2@-0.34,41.56 ; v1@0.3,28.55 v1(0.3,28.68) 0.3,30.24 -1.5,32.04 -1.5,40.98 -0.92,41.56 R8.2@-0.34,41.56 ; S1.3@2.525,45.627 -0.34,45.627 ; R8.2@-0.34,41.56 -0.34,45.627
  L4 w0.152: v1(-5.7,21.14) -5.45,21.39 -5.45,22.14 -5.229,22.361 -4.579,22.361 -3.927,21.709 -3.042,21.709 -2.23,22.521 -2.23,25.606 0.3,28.136 v1(0.3,28.68)
SPK_N: R25.2 U3.39 | length 3
  L1 w0.152: v1(0.01,33.39) 0.33,33.07 R25.2@0.33,32.403
  L4 w0.152: U3.39@-0.1,31.515 U3.39@-0.1,32.07 -0.1,33.28 v1(0.01,33.39)
SPK_P: R26.2 U3.38 | length 5.6
  L1 w0.152: v1(-0.59,33.92) 0.35,33.92 1.07,33.2 R26.2@1.07,32.403
  L4 w0.152: U3.38@-1.2,31.37 U3.38@-1.2,32.07 -1.2,33.31 v1(-0.59,33.92)
SPK_P_IN: C35.2 D11.2 R20.1 R24.1 U6.7 | length 36.5
  L1 w0.152: D11.2@-10.89,12.17 -10.89,13.193 R20.1@-10.947,13.25 -10.944,13.252 R24.1@-10.274,13.252 -10.274,13.676 -9.29,14.66 -8.503,14.66 C35.2@-7.165,13.322 ; C35.2@-7.367,13.322 C35.2@-7.165,13.322 ; U6.7@-5.886,28.816 -5.431,29.27 -4.66,29.27 -3.975,29.955 -1.623,29.955 -1.22,29.552 -1.22,28.645 -0.605,28.03 1.98,28.03 2.38,27.63 2.38,26.7 v1(1.76,26.08) ; v1(-4.87,17.25) -4.87,15.33 -6.878,13.322 C35.2@-7.165,13.322
  L4 w0.152: v1@-4.87,17.36 -4.84,17.36 -3.634,18.566 -1.931,18.566 -1.202,19.295 -1.202,20.555 0.015,21.772 0.24,21.772 0.751,22.283 0.751,22.657 0.42,22.988 0.42,24.75 v1@1.755,26.085
SWCLK: P5.2 U6.17 | length 11.5
  L1 w0.152: P5.2@-17.92,34.87 -16.9,34.87 -15.507,33.477 -15.507,31.13 -14.244,29.866 -10.861,29.866 U6.17@-10.164,29.169
SWDIO: P5.3 U6.20 | length 9.9
  L1 w0.152: P5.3@-17.7,33.57 -16.95,33.57 -16.52,33.14 -16.52,31.18 -14.602,29.262 -12.377,29.262 U6.20@-11.224,28.109
UART0_TX: U1.21
UART1_RX: U3.16 U6.36 | length 10.3
  L1 w0.152: U6.36@-8.749,21.709 -8.08,21.04 -8.08,17.13 v1@-7.29,16.34
  L4 w0.152: v1@-7.29,16.34 -4.5,13.55 U3.16@-4.5,13.12
  other v1: -7.28,16.35
UART1_TX: U3.15 U6.37 | length 10.5
  L1 w0.152: U6.37@-7.653,21.709 -7.653,17.523 v1@-7.146,17.016
  L4 w0.152: v1(-7.191,16.971) -4.59,14.37 -4.23,14.37 -3.4,13.54 U3.15@-3.4,13.12
V_BCKP: C3.2 U1.22 U3.2 | length 44.9
  L2 w0.203: v1(-12.4,33.81) -12.4,33.48 -10.322,31.402 -10.322,26.626 -8.512,24.816 -8.512,18.452 -8.43,18.37 -8.43,15.69 -5.59,12.85 v1(-5.59,11.65)
  L4 w0.203: U1.22@-13.01,34.9 -13.01,33.81 v1(-12.4,33.81)
  L4 w0.254: v1(-5.59,11.65) -4.8,10.86 9.44,10.86 10.9,12.32 U3.2@10.9,13.12
VBAT: C39.2 P7.1 Q2.2 R29.2 U8.3 | length 19
  L1 w0.6: C39.2@7.5,49.707 v1(7.5,49.27) v1(7.5,48.56) 7.5,48.46 U8.3@8.23,47.73 9.695,47.73 Q2.2@9.9,47.525 12.579,50.204 P7.1@12.579,50.48 12.86,50.48 13.773,49.567 R29.2@13.773,47.8
  L2 w0.6: v1@7.5,49.24 v1(7.5,48.56) 7.5,48.46 8.35,47.61 9.97,47.61 12.579,50.219 P7.1@12.579,50.48
  other v1: 6.89,48.8 6.9,49.49
VGPS: C5.2 C6.2 R1.2 R2.2 U1.23 U2.5 | length 27.9
  L1 w0.254: R1.2@-9.27,39.973 -7.707,39.973 v1(-7.66,40.02) ; v1@1.57,41.11 2.33,41.87 C6.2@3.72,41.87 4.023,41.87 C5.2@4.75,42.597 4.857,42.703 U2.5@5.83,42.703
  L2 w0.254: v1(-7.66,40.02) -5.81,40.02 -4.74,41.09 v1(1.57,41.09)
  L4 w0.254: U1.23@-14.11,34.9 -14.25,35.04 -14.25,37.12 -14.45,37.32 -14.45,39.37 -13.8,40.02 v1(-7.66,40.02)
VGSM: C7.2 C8.1 C9.1 C10.2 C11.1 C43.1 Q2.3 U2.1 U3.50 U7.6 U9.1 U9.3 | length 95.6
  L1 w0.381: U7.6@-15.349,12.632 -15.349,11.989 v1(-14.92,11.56)
  L1 w0.508: U9.1@8.22,39.46 9.04,39.46 9.48,39.9 9.48,41.2 9.35,41.33
  L1 w0.6: v1(-0.16,18.27) -0.14,18.29 v1(3.46,18.29) v1(3.46,19.07) -0.02,19.07 v1(-0.16,18.93) ; U9.3@8.23,41.33 9.35,41.33 v1(9.95,41.33) 10.84,41.33 10.85,41.34 v1(10.85,42.22) 10.85,42.703 ; U2.1@8.23,42.703 10.85,42.703 ; Q2.3@10.85,45.162 v1(10.85,44.24) v1(10.85,43.05) 10.85,42.703
  L2 w0.6: v1(-14.92,11.56) -12.69,9.33 -4.8,9.33 -0.16,13.97 v1(-0.16,18.27) v1(-0.16,18.93) ; v1(3.46,18.29) v1(3.46,19.07) 3.46,20.87 4.77,22.18 4.77,27.63 5.695,28.555
  L2 w1.524: 5.695,28.555 4.85,29.4 4.85,38.507 7.083,40.74 9.94,40.74 10.85,41.65 v1(10.85,42.22) v1(10.85,43.05) 10.85,43.74
  L4 w0.6: U3.50@12,32.07 U3.50@12.38,32.07 ; 12.95,32.07 15.96,32.07 16.697,32.07 C10.2@16.76,32.007 ; C8.1@15.96,32.007 15.97,31.997 C11.1@15.97,30.34
  L4 w1.524: 4.88,29.35 5.565,28.665 6.31,27.92 10.77,27.92 12.38,29.53 12.38,30.22 ; U3.50@12.38,32.07 12.38,30.22 ; C11.1@15.97,30.34 12.5,30.34 12.38,30.22
  other v1: 5.24,28.34 5.85,29.07 5.132,29.098 4.41,29.28 5.04,29.82 10.8,41.32
pads on no net: E2.2 E2.3 E2.4 E2.5 P3.6 P7.3 U1.1 U1.2 U1.5 U1.6 U1.7 U1.14 U1.15 U1.16 U1.17 U2.4 U3.4 U3.5 U3.9 U3.11 U3.14 U3.18 U3.20 U3.21 U3.26 U3.27 U3.28 U3.29 U3.37 U3.40 U3.41 U3.42 U5.2 U5.10 U5.11 U5.12 U5_1.10 U5_2.2 U5_2.3 U5_2.5 U5_2.9 U5_2.10 U5_2.15 U6.21 U9.4

## Polygon pours and split planes (outlines as drawn)
GND on L3 "L3-GND" (solid, pour order 1001): -17.365,6.202 -16.305,6.202 cw(c-16.305,4.202) -14.305,4.202 -14.305,1.364 -14.306,1.363 ccw(c-0.048,75.346) 14.29,1.379 14.295,1.379 14.295,4.202 cw(c16.295,4.202) 16.295,6.202 16.298,6.198 17.365,6.198 ccw(c-242.05,30.57) 17.434,54.203 17.432,54.202 15.64,54.202 ccw(c15.64,53.752) 15.19,53.752 15.19,53.23 cw(c14.77,53.23) 14.77,52.81 -7.16,52.81 -7.16,58.26 ccw(c-8.43,58.26) -8.43,59.53 -13.305,59.53 ccw(c-13.305,58.53) -14.305,58.53 -14.305,56.202 cw(c-16.305,56.202) -16.305,54.202 -17.433,54.202 -17.433,54.204 ccw(c242.051,30.571)
GND on L4 "L4-GND" (solid, pour order 1004): -17.365,6.202 -16.305,6.202 cw(c-16.305,4.202) -14.305,4.202 -14.305,1.364 -14.306,1.363 ccw(c-0.048,75.346) 14.29,1.379 14.295,1.379 14.295,4.202 cw(c16.295,4.202) 16.295,6.202 16.298,6.198 17.365,6.198 ccw(c-242.05,30.57) 17.434,54.203 17.432,54.202 15.64,54.202 ccw(c15.64,53.752) 15.19,53.752 15.19,53.23 cw(c14.77,53.23) 14.77,52.81 -7.16,52.81 -7.16,58.26 ccw(c-8.43,58.26) -8.43,59.53 -13.305,59.53 ccw(c-13.305,58.53) -14.305,58.53 -14.305,56.202 cw(c-16.305,56.202) -16.305,54.202 -17.433,54.202 -17.433,54.204 ccw(c242.051,30.571)
GND on L1 "L1-GND" (solid, pour order 1003): -17.365,6.202 -16.305,6.202 cw(c-16.305,4.202) -14.305,4.202 -14.305,2.52 6.59,2.49 6.59,25.32 7.77,31.2 9.13,34.14 9.13,37.06 11.34,39.67 18.4,39.63 18.31,40.67 17.434,54.203 17.432,54.202 15.64,54.202 ccw(c15.64,53.752) 15.19,53.752 15.19,53.23 cw(c14.77,53.23) 14.77,52.81 -7.16,52.81 -7.16,58.26 ccw(c-8.43,58.26) -8.43,59.53 -13.305,59.53 ccw(c-13.305,58.53) -14.305,58.53 -14.305,56.202 cw(c-16.305,56.202) -16.305,54.202 -17.433,54.202 -17.433,54.204 ccw(c242.051,30.571)
GND on L2 "L2-GND" (solid, pour order 1002): -17.365,6.202 -16.305,6.202 cw(c-16.305,4.202) -14.305,4.202 -14.305,2.52 6.59,2.49 6.59,25.32 7.77,31.2 9.13,34.14 9.13,37.06 11.34,39.67 18.36,39.62 17.434,54.203 17.432,54.202 15.64,54.202 ccw(c15.64,53.752) 15.19,53.752 15.19,53.23 cw(c14.77,53.23) 14.77,52.81 -7.16,52.81 -7.16,58.26 ccw(c-8.43,58.26) -8.43,59.53 -13.305,59.53 ccw(c-13.305,58.53) -14.305,58.53 -14.305,56.202 cw(c-16.305,56.202) -16.305,54.202 -17.433,54.202 -17.433,54.204 ccw(c242.051,30.571)
no net on Top Overlay "Top Overlay-No Net" (solid, pour order 1000): -6.02,11.08 ccw(c-0.02,11.08) -0.02,5.08 ccw(c-0.02,11.08) 5.98,11.08 ccw(c-0.02,11.08) -0.02,17.08 ccw(c-0.02,11.08)

## Keep-outs
Keep-Out Layer:
  lines w0.127: -17.433,54.204 ccw(c242.051,30.571) -17.365,6.199 ; -17.433,54.202 -16.305,54.202 ccw(c-16.305,56.202) -14.305,56.202 -14.305,58.53 cw(c-13.305,58.53) -13.305,59.53 -8.45,59.53 -8.43,59.53 cw(c-8.43,58.26) -7.16,58.26 ; -17.365,6.202 -16.305,6.202 cw(c-16.305,4.202) -14.305,4.202 -14.305,1.364 ccw(c-0.048,75.346) 14.29,1.379 ; -7.16,58.24 -7.16,52.81 14.77,52.81 ccw(c14.77,53.23) 15.19,53.23 15.19,53.752 cw(c15.64,53.752) 15.64,54.202 17.432,54.202 ; 14.295,1.379 14.295,4.202 cw(c16.295,4.202) 16.295,6.202 ; 16.298,6.198 17.365,6.198 ccw(c-242.05,30.57) 17.434,54.203

## Other copper
L1:
  region net VBAT: 7.83,49.9 6.85,49.9 6.58,49.63 6.58,48.53 7.69,47.42 8.82,47.42 8.82,47.97 8.84,47.99 8.53,47.99 8.03,48.49 8.03,49.7
  region net VBAT: 12,52.37 10,50.72 10,48.4 9.78,48.06 8.27,48.06 7.82,48.51 7.6,48.29 7.6,47.51 7.71,47.4 9.16,47.4 9.61,46.95 10.44,46.95 10.44,47.54 11.48,48.58 13.13,48.58 13.13,52.38 13.15,52.4
  region net 5V: 6.48,47.38 3.73,47.38 2.98,48.13 2.98,49.64 3.36,50.02 4.06,50.02 4.49,49.59 4.49,48.34 4.76,48.07 6.48,48.07
L2:
  region net VBAT: 13.13,52.38 11.78,52.38 10.3,50.9 10.3,48.58 9.78,48.06 8.46,48.06 8.03,48.49 8.03,49.7 7.83,49.9 6.85,49.9 6.58,49.63 6.58,48.58 8.21,46.95 9.83,46.95 11.46,48.58 13.13,48.58

## Silkscreen, mask and mechanical layers (free items; w line width, h text height)
Top Overlay:
  circle w0.2: c-0.02,11.08 r6
  lines w0.127: -17.336,18.866 -16.402,18.866 -16.301,18.64 -15.68,18.4 ; -15.88,18.34 -15.68,18.4 ; -15.68,18.4 -15.68,18.56 -15.68,18.4
  lines w0.2: 16.972,43.625 cw(c14.706,43.991) 16.972,43.627
  text "G" at -12.31,54.77 h1.27
  text "R" at -8.18,54.75 h1.27
  text "B" at -10.24,54.73 h1.27
  text "MIC" at 13.482,40.655 h0.64
  text "JTAG" at -17.84,39.63 h0.64 r270
  text "GSM_ANTENNA" at 9.35,18.82 h0.64 r90
  text "SPEAKER" at -8.75,1.64 h0.64
Bottom Overlay:
  rectangle: 4.25,35.76 11.11,46.12
  rectangle: -16.225,14.495 13.85,30.78
  rectangle: -16.13,35.78 -0.28,45.7
Bottom Solder:
  rectangle: -3.35,50.83 4.15,52.41
Mechanical 1:
  circle w0.127: c-9.805,3.902 r1
  circle w0.127: c-3.705,3.902 r1
  circle w0.127: c2.395,3.902 r1
  circle w0.127: c8.495,3.902 r1
Mechanical 2:
  lines w0.127: -14.15,45.724 -14.15,48.924 -9.65,48.924 -9.65,45.724 -14.15,45.724 ; -12.866,46.752 cw(c-12.231,47.387) -12.866,48.022 -10.961,48.022 cw(c-11.596,47.387) -10.961,46.752 -12.866,46.752 ; -1.577,42.834 -1.577,46.034 2.923,46.034 2.923,42.834 -1.577,42.834 ; -0.293,43.862 cw(c0.342,44.497) -0.293,45.132 1.612,45.132 cw(c0.977,44.497) 1.612,43.862 -0.293,43.862
Mechanical 4:
  lines w0.127: 5.346,49.003 5.346,52.003 5.846,52.003 5.846,49.003 5.346,49.003 ; 8.834,49.003 8.834,52.003 9.334,52.003 9.334,49.003 8.834,49.003 ; 12.334,49.003 12.334,52.003 12.834,52.003 12.834,49.003 12.334,49.003
Mechanical 5:
  lines w0.127: 16.295,6.202 ccw(c16.298,6.202) 16.298,6.198 ; -16.305,6.202 ccw(c-16.305,6.202) -16.305,6.202
Mechanical 7:
  lines w0.127: -17.311,43.735 -16.041,43.735 -16.041,44.37 -17.311,44.37 -17.311,43.735 ; -17.311,44.751 -16.041,44.751 -16.041,45.386 -17.311,45.386 -17.311,44.751 ; -17.311,45.767 -16.041,45.767 -16.041,46.402 -17.311,46.402 -17.311,45.767